# Altium PCB PCB.PcbDoc
Units mil, origin at the board's own origin, x right, y up, seen from the top; angles counter-clockwise.
Board outline 825 x 880 mil, 2 copper layers (Top Layer, Bottom Layer); 5 components, 10 nets, 25 pads, 0 vias.
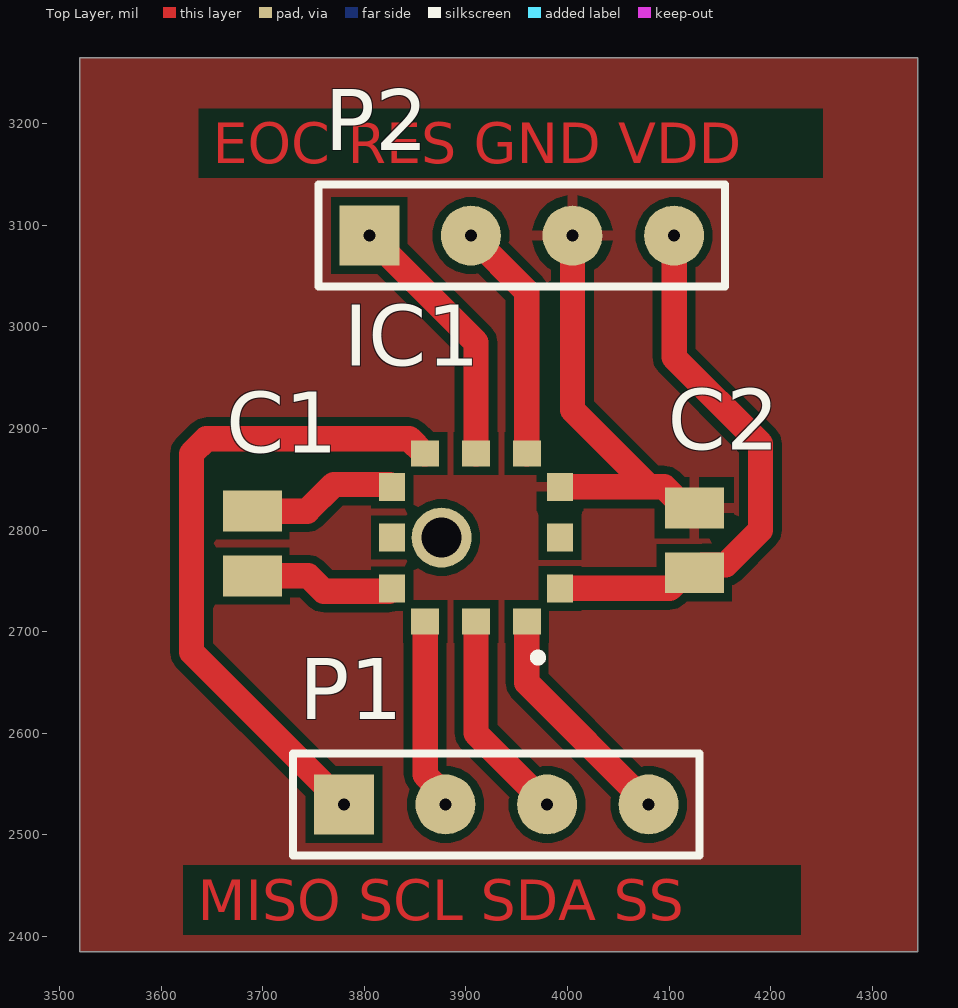
[diagram p0: Top Layer view]
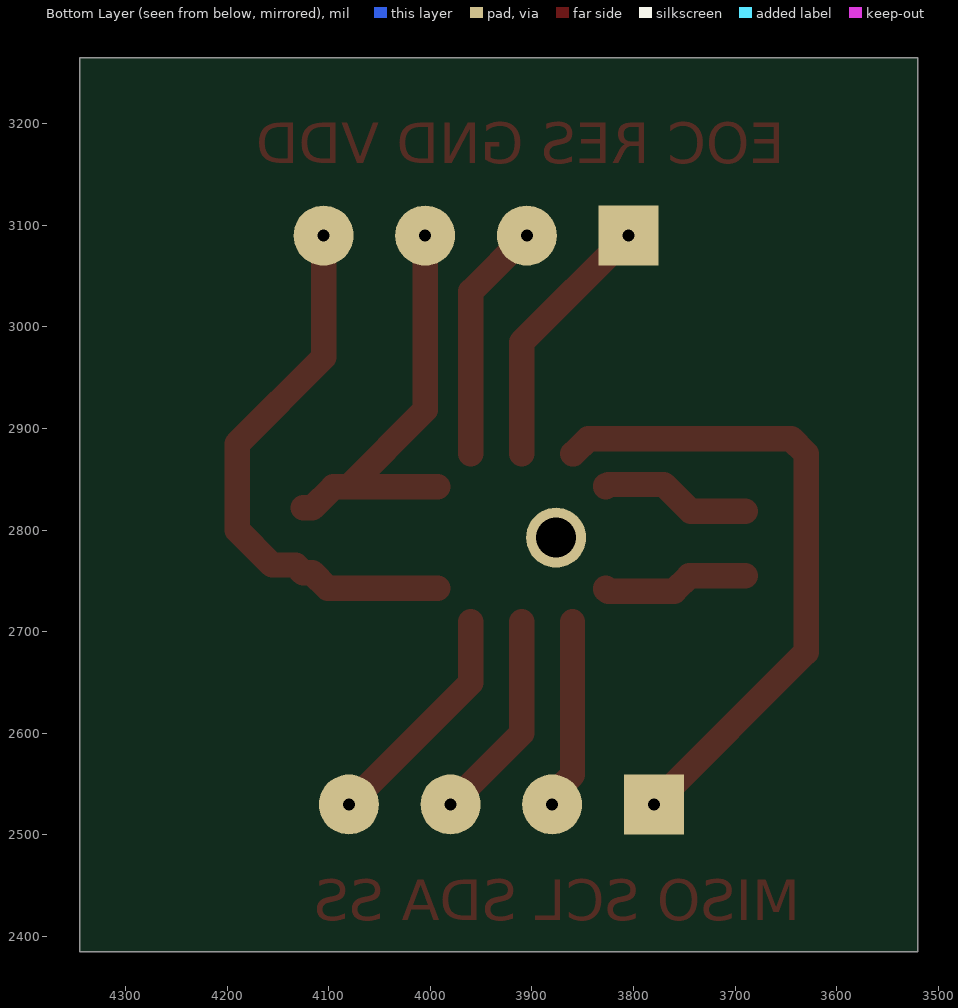
[diagram p1: Bottom Layer view, seen from below]
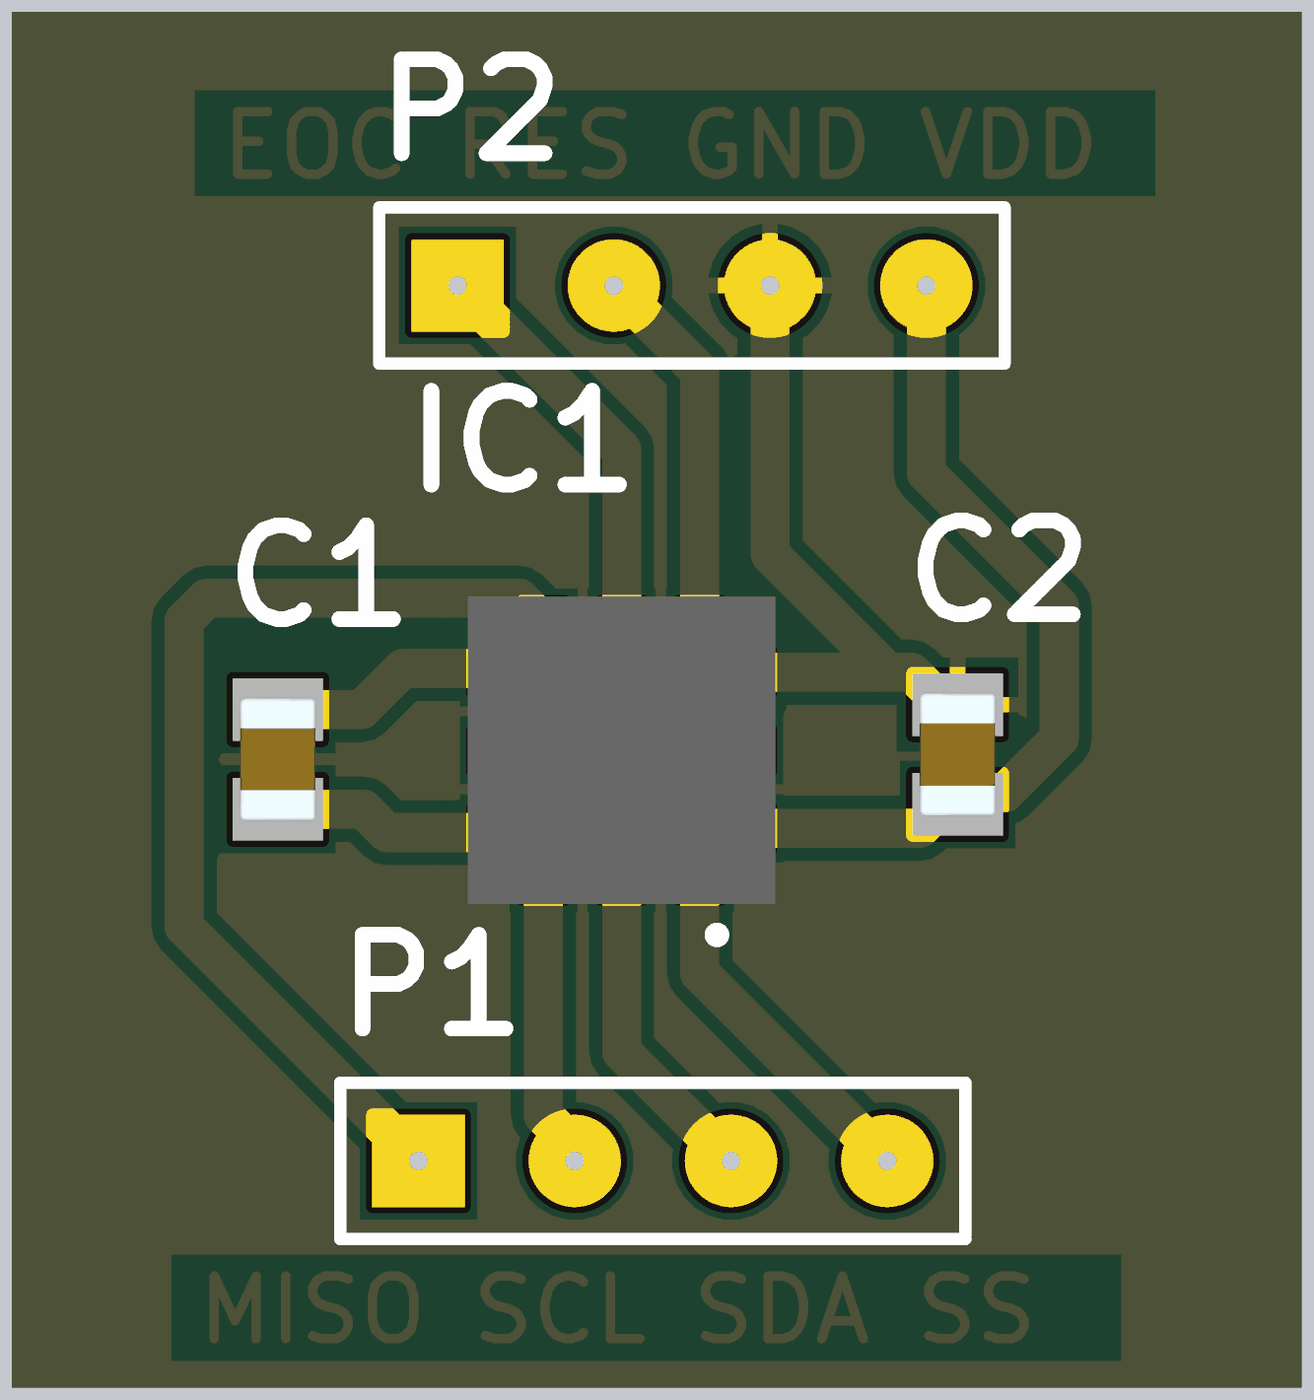
[diagram p2: 3D render of the assembled board from above, using the file's embedded part models]

## Layer stack, top to bottom
Top Solder: solder mask 0.4, Solder Resist, Dk 3.5
Top Layer: signal copper 1.4
Dielectric 1: dielectric 12.6, FR-4, Dk 4.8
Bottom Layer: signal copper 1.4
Bottom Solder: solder mask 0.4, Solder Resist, Dk 3.5

## Board outline
3520,2385 4345,2385 4345,3265 3520,3265

## Design rules (kind name [scope] priority, off if disabled: settings)
Clearance [All] p1: gap=8 ignorepadtopadclearanceinfootprint=FALSE
PolygonConnect [All] p1: connectstyle=Relief reliefconductorwidth=10 reliefentries=4 polygonreliefangle="90 Angle" airgapwidth=10
RoutingVias [All] p1: holewidth=28 width=50 viastyle="Through Hole" minholewidth=28 minwidth=50 maxholewidth=28 maxwidth=50
SolderMaskExpansion [All] p1: expansion=4 istentingtop=FALSE
Width [All] p1: maxlimit=100 minlimit=10 preferedwidth=10 bottomlayer_maxwidth=10 minimp=50.000000 maximp=50.000000 favimp=50.000000
30 further rules are at their usual default settings.

## Components (designator, comment, footprint, x,y, rotation, side; value= is the part's Value field where it differs from the comment)
C1 "1nF" CAPC2012X94N 3690,2786.89 r270 top
C2 "08055A130JAT2A" CAPC2012X94N 4125,2790 r270 top
IC1 "MPRLS0015PG0000SA" MPRLS0015PG0000SA 3910,2792.68 r0 top
P1 "Header 4" HDR1X4 3780,2530 r0 top
P2 "Header 4" HDR1X4 3805,3090 r0 top

## Footprints (in the part's own frame and the unit in brackets; to place one, negate y for a bottom-side part, rotate by r counter-clockwise, add the part's x,y. Pads: shape width x height; smd on the part's side, far side on the other; paste and mask are expansions set on the pad)
CAPC2012X94N [mm]
  rect 1.02x1.47 smd: 1(-0.81,0) 2(0.81,0)
  body extent -1,-0.63 1,0.63, height 0.94
HDR1X4 [mm] "Connector; Header; 4 Position"
  rect 1.5x1.5 hole 0.3: 1(0,0)
  round 1.5 hole 0.3: 2(2.54,0) 3(5.08,0) 4(7.62,0)
  silkscreen extent -1.27,-1.27 8.89,1.27
MPRLS0015PG0000SA [mm]
  rect 0.7x0.65 smd: 1(1.27,-2.1) 2(0,-2.1) 3(-1.27,-2.1) 7(-1.27,2.1) 8(0,2.1) 9(1.27,2.1)
  rect 0.65x0.7 smd: 4(-2.1,-1.27) 5(-2.1,0) 6(-2.1,1.27) 10(2.1,1.27) 11(2.1,0) 12(2.1,-1.27)
  round 1.5 hole 1: 13(-0.86,0)
  silkscreen extent 1.5,-3.05 1.6,-2.95, body extent -2.5,-2.5 2.5,2.5, height 5.9

## Part data
C1: library part 08055A130JAT2A, "Capacitor", Manufacturer_Name=AVX, Mouser Part Number=581-08055A130JAT2A, Datasheet Link=https://componentsearchengine.com/Datasheets/1/06031A100FAT2A.pdf, Height=0.94mm, Manufacturer_Part_Number=08055A130JAT2A, Mouser Price/Stock=https://www.mouser.com/Search/Refine.aspx?Keyword=581-08055A130JAT2A
C2: "Capacitor", Manufacturer_Name=AVX, Mouser Part Number=581-08055A130JAT2A, Datasheet Link=https://componentsearchengine.com/Datasheets/1/06031A100FAT2A.pdf, Height=0.94mm, Manufacturer_Part_Number=08055A130JAT2A, Mouser Price/Stock=https://www.mouser.com/Search/Refine.aspx?Keyword=581-08055A130JAT2A
IC1: "Integrated Circuit", Manufacturer_Name="Honeywell Sensing and Productivity Solutions", Datasheet Link=https://sensing.honeywell.com/honeywell-sensing-micropressure-board-mount-pressure-mpr-series-datasheet-32332628.pdf, Height=5.8mm, Manufacturer_Part_Number=MPRLS0015PG0000SA
P1 P2: "Header, 4-Pin", LatestRevisionDate=17-Jul-2002, LatestRevisionNote="Re-released for DXP Platform.", Publisher="Altium Limited"

## Nets (pads, with @x,y where several pads share a name; then routed paths per layer and width w, separated by ;. In a path a pad name is that pad's centre, name@x,y a point inside that pad or via, vN(x,y) a via of type N, cw(c..) or ccw(c..) an arc to the next point about the centre after c; other vN are vias at no path point)
GND: C2.1 IC1.10 P2.3 | length 419.6
  Top Layer w25: IC1.10 4080.61,2842.68 ; P2.3 4005,2918.28 4080.61,2842.68 ; C2.1 4116.14,2821.89 4095.35,2842.68 4080.61,2842.68
NetC1_1: C1.1 IC1.6 | length 149.7
  Top Layer w25: C1.1 3743.78,2818.78 3770,2845 3825,2845 3826.04,2843.96 3827.03,2843.96 3827.32,2843.66 IC1.6
NetC1_2: C1.2 IC1.4 | length 145.2
  Top Layer w25: C1.2 3745,2755 3760,2740 3824.65,2740 3826.04,2741.4 3827.03,2741.4 3827.32,2741.69 IC1.4
NetC2_2: C2.2 IC1.12 P2.4 | length 546.3
  Top Layer w25: IC1.12 4100.71,2742.68 4116.14,2758.11 C2.2 4132.58,2765.69 4155.69,2765.69 4190,2800 4190,2885.01 4105,2970.01 P2.4
NetIC1_1: IC1.1 P1.4 | length 229.7
  Top Layer w25: IC1.1 3960,2650 P1.4
NetIC1_2: IC1.2 P1.3 | length 209
  Top Layer w25: IC1.2 3910,2600 P1.3
NetIC1_3: IC1.3 P1.2 | length 188.3
  Top Layer w25: IC1.3 3860,2559.22 3880,2539.22 P1.2
NetIC1_7: IC1.7 P1.1 | length 649.6
  Top Layer w25: P1.1 3630,2680 3630,2875.36 3644.64,2890 3844.37,2890 3859.02,2875.35 IC1.7
NetIC1_8: IC1.8 P2.1 | length 258.1
  Top Layer w25: P2.1 3910,2985 IC1.8
NetIC1_9: IC1.9 P2.2 | length 237.4
  Top Layer w25: P2.2 3960,3035 IC1.9
pads on no net: IC1.5 IC1.11 IC1.13

## Polygon pours and split planes (outlines as drawn)
GND on Top Layer "GND_L01_P000" (solid, pour order 0): 3520,3265 4345,3265 4345,2385 3520,2385

## Other copper
Top Layer:
  text "EOC RES GND VDD" at 3651,3161 h40
  text "MISO SCL SDA SS" at 3636,2416 h40